# Altium PCB powerboardv2.PcbDoc
Units mil, origin at the board's own origin, x right, y up, seen from the top; angles counter-clockwise.
Board outline 3000 x 1500 mil, 2 copper layers (Top Layer, Bottom Layer); 12 components, 11 nets, 60 pads, 0 vias.
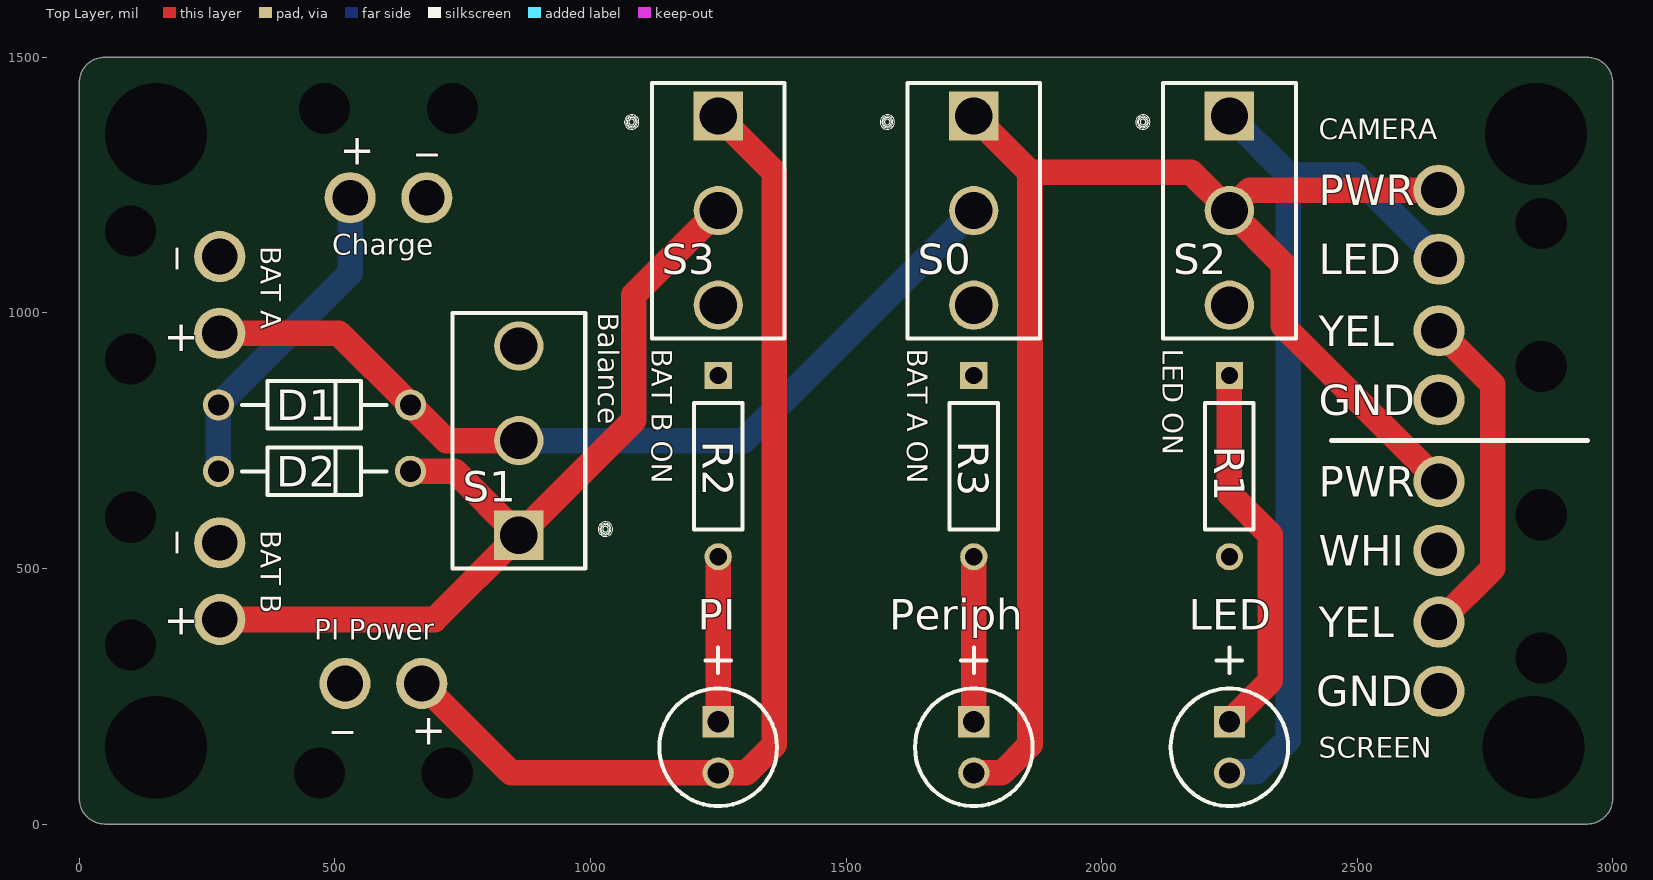
[diagram p0: Top Layer view]
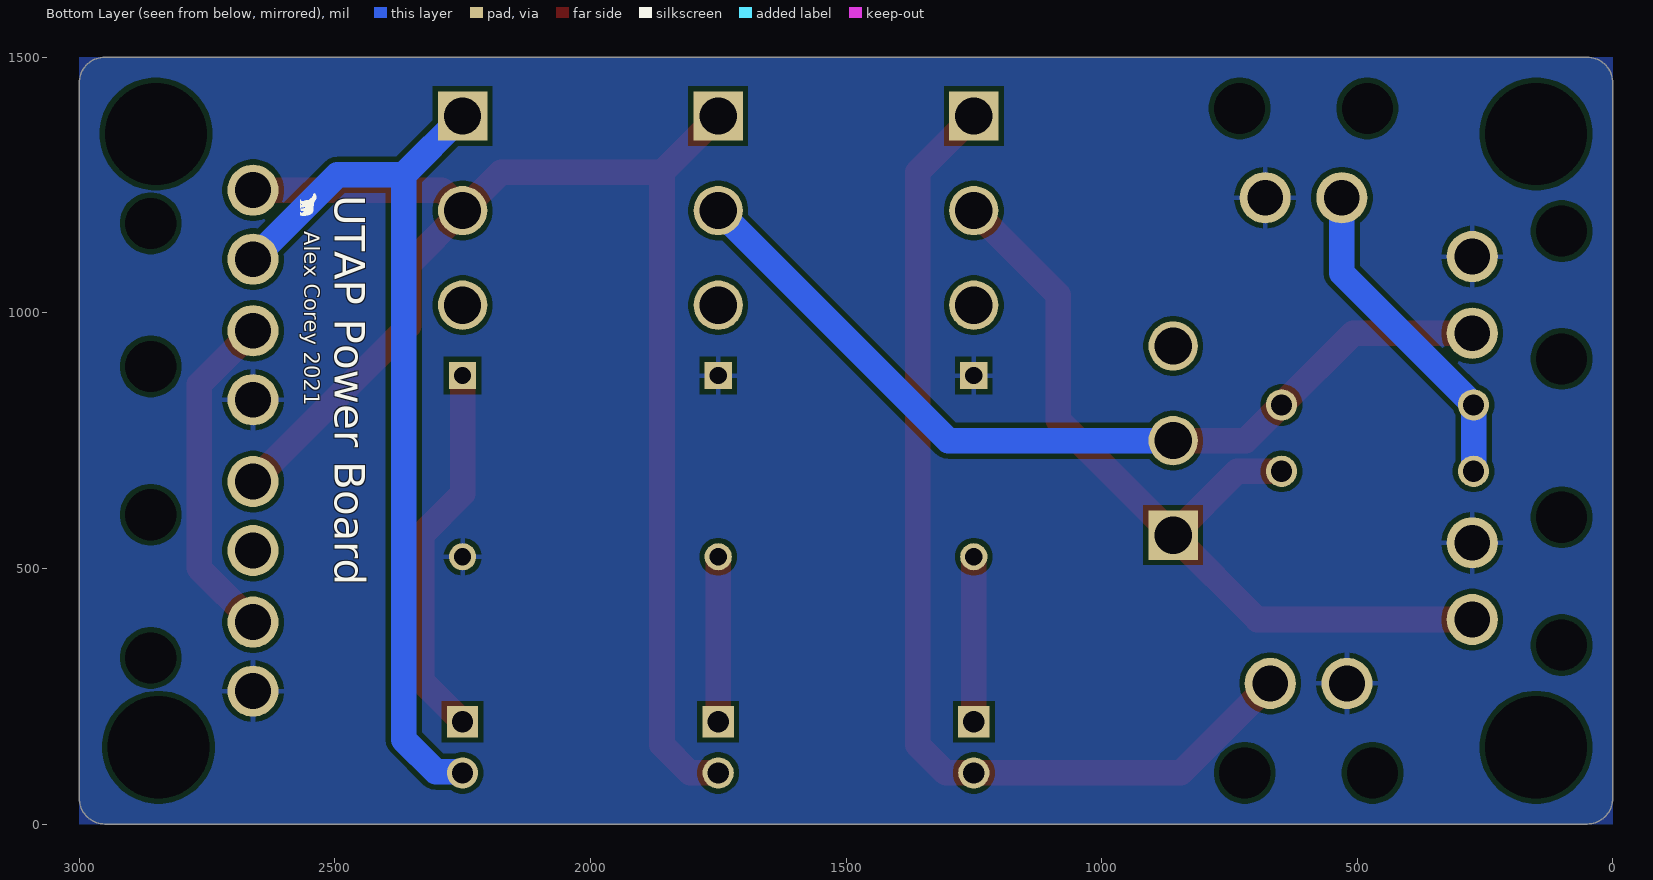
[diagram p1: Bottom Layer view, seen from below]

## Layer stack, top to bottom
Top Solder: solder mask 0.4, Solder Resist, Dk 3.5
Top Layer: signal copper 1.4
Dielectric 1: dielectric 12.6, FR-4, Dk 4.8
Bottom Layer: signal copper 1.4
Bottom Solder: solder mask 0.4, Solder Resist, Dk 3.5

## Board outline
0,50 0,1450 cw(c50,1450) 50,1500 2950,1500 cw(c2950,1450) 3000,1450 3000,50 cw(c2950,50) 2950,0 50,0 cw(c50,50)

## Design rules (kind name [scope] priority, off if disabled: settings)
Clearance [All] p1: gap=10 ignorepadtopadclearanceinfootprint=FALSE except(0: Arc-Hole Track-Hole SMDPad-Hole THPad-Hole Via-Hole Fill-Hole Poly-Hole Region-Hole Text-Hole)
PolygonConnect [All] p1: connectstyle=Relief reliefconductorwidth=10 reliefentries=4 polygonreliefangle="90 Angle" airgapwidth=10
RoutingVias [All] p1: holewidth=28 width=50 viastyle="Through Hole" minholewidth=28 minwidth=50 maxholewidth=28 maxwidth=50
SolderMaskExpansion [All] p1: expansion=4 istentingtop=FALSE
Width [All] p1: maxlimit=100 minlimit=10 preferedwidth=50
30 further rules are at their usual default settings.

## Components (designator, comment, footprint, x,y, rotation, side; value= is the part's Value field where it differs from the comment)
D1 "1N4001" ONSC-AXIAL_LEAD-2-59-10_P 460,820 r180 top
D2 "1N4001" ONSC-AXIAL_LEAD-2-59-10_P 460,690 r180 top
LED "HLMP-3301" AVAG-HLMP-3301-2 2250,200 r270 top (schematic designator DS1)
Periph "HLMP-3301" AVAG-HLMP-3301-2 1750,200 r270 top (schematic designator DS2)
PI "HLMP-3301" AVAG-HLMP-3301-2 1250,200 r270 top (schematic designator DS3)
R1 "MFR-25FBF52-1K" RESA60-630X240 2250,700 r270 top
R2 "MFR-25FBF52-1K" RESA60-630X240 1250,700 r270 top
R3 "MFR-25FBF52-1K" RESA60-630X240 1750,700 r270 top
S0 "1101M2S3CQE2" SW_1101M2S3CQE2 1750,1200 r0 top (schematic designator S)
S1 "1101M2S3CQE2" SW_1101M2S3CQE2 860,750 r180 top
S2 "1101M2S3CQE2" SW_1101M2S3CQE2 2250,1200 r0 top
S3 "1101M2S3CQE2" SW_1101M2S3CQE2 1250,1200 r0 top

## Footprints (in the part's own frame and the unit in brackets; to place one, negate y for a bottom-side part, rotate by r counter-clockwise, add the part's x,y. Pads: shape width x height; smd on the part's side, far side on the other; paste and mask are expansions set on the pad)
AVAG-HLMP-3301-2 [mm] "THD, 2-Leads, Body Dia 5.85mm"
  rect 1.55x1.55 hole 1.05: 1(0,0)
  round 1.55 hole 1.05: 2(2.54,0)
  silkscreen extent -3.68,-2.92 4.19,2.92
ONSC-AXIAL_LEAD-2-59-10_P [mm] "AXIAL, 2-Leads, Diameter 2.35mm"
  round 1.55 hole 1.05: 1(-4.77,0) 2(4.77,0)
  silkscreen extent -3.59,-1.17 3.59,1.17
RESA60-630X240 [mm] "Axial Resistor, 2-Leads, Dia 2.4mm, Body Length 6.3mm"
  rect 1.35x1.35 hole 0.85: 1(-4.5,0)
  round 1.35 hole 0.85: 2(4.5,0)
  silkscreen extent -3.15,-1.2 3.15,1.2, body extent -3.15,-1.2 3.15,1.2, height 2.4
SW_1101M2S3CQE2 [mm]
  rect 2.45x2.45 hole 1.85: 1(0,4.7)
  round 2.45 hole 1.85: 2(0,0) 3(0,-4.7)
  silkscreen extent -4.66,-6.35 3.3,6.35

## Part data
D1 D2: library part CMP-0902-00117-1, "Standard Recovery Rectifier, 2-Pin Axial_Lead, Pb-Free, Bulk Bag", Manufacturer="On Semiconductor", ComponentLink1Description="Manufacturer URL", ComponentLink1URL=http://www.onsemi.com/, ComponentLink2Description=Datasheet, ComponentLink2URL=http://www.onsemi.com/pub_link/Collateral/1N4001-D.PDF, ComponentLink3Description="Package Specification", ComponentLink3URL=http://www.onsemi.cn/pub_link/Collateral/59-10.PDF, DatasheetVersion="Rev. 13", IFSM Max (A)=30, IO(rec) Max (A)=1, Mounting Technology="Through Hole", PackageDescription="2-Pin, Axial Lead, Diameter 2.35 mm", PackageReference=AXIAL_LEAD-2-59-10, PackageVersion="Rev. U, 02/2005", Packing="Bulk Bag", PartNumber=1N4001, RoHS=TRUE, Type="Standard Recovery", VRRM Max (V)=50
LED Periph PI: library part CMP-2000-06411-1, "T-1 3/4 (5 mm) Diffused LED Lamp, 1.9 V, -40 to 100 degC, 2-Pin THD, RoHS, Bulk", Emitting Color=Red, Forward Current=25mA, Forward Voltage=2.4V, Manufacturer=Avago, Operating Temp Range=-40Cto100C, Operating Temperature Classification=Industrial, Package Description="2-Pin Through Hole LED, Dia 5.85 mm", Package Type=T-13/4, Power Dissipation=85W, Reverse Voltage=5V, Test Current (It)=10mA, Chip Material=GaP, Datasheet URL=http://www.avagotech.com/docs/AV02-1558EN, Datasheet Version=03/2015, DELETED=Compliant, Dominant Wave Length=626nm, High Brightness=No, Lens Dimensions=5.08x5.08x8.3mm, Lens Type=ColoredDiffused, Lum Intensity=5.4mcd, Luminous Intensity=5.4mcd, Main Category=StandardLED, Manufacturer URL=http://www.avagotech.com/, Mounting=ThroughHole, Mounting Technology=ThroughHole, Number of  Elements=1, Package Reference=HLMP-3301, Packaging=TapeandReel, Peak Wavelength=635nm, Pin Count=2, Product Depth (mm)=6.1mm, Product Height (mm)=9.19mm, Product Length (mm)=6.1mm, Rad Hardened=No, Shape Type=Circular, Type=Uni-Color, Viewing Angle=60deg
R1 R2 R3: library part CMP-1659-00075-1, "Axial Resistor, 1 KOhm, +/- 1%, 250 mW, -55 to 155 degC, 2-Pin THD, RoHS, Bulk", Case\Package=Axial, Max Operating Temperature="155 degC", Min Operating Temperature="-55 degC", Package Quantity=200, Power Rating="250 mW", Resistance="10 kohm", Tolerance=1%, Voltage Rating="250 V", ComponentLink1Description="Manufacturer URL", ComponentLink1URL=http://www.yageo.com/, ComponentLink2Description=Datasheet, ComponentLink2URL=http://www.yageo.com/documents/recent/Yageo%20LR_MFR_2013.pdf, DatasheetVersion=Apr-13, Length="0.248 inch", PackageDescription="2-Pin Axial Lead, Dia 2.4 mm, Body Length 6.3 mm", PackageReference=MFR-25, Packaging=Bulk, RoHSCompliant=true
S0 S1 S2 S3: "Slide Switch SPDT Through Hole", Package=None, Digi-Key_Part_Number=CKN5001-ND, Digi-Key_Purchase_URL=https://www.digikey.fr/product-detail/en/c-k/1101M2S3CQE2/CKN5001-ND/67042?utm_source=snapeda&utm_medium=aggregator&utm_campaign=symbol, MF=C&K, MP=1101M2S3CQE2, SnapEDA_Link=https://www.snapeda.com/parts/1101M2S3CQE2/C%26K/view-part/287375/?ref=snap

## Free pads (board coordinates)
  round 100 hole 70: 45(275,400) 45(275,550) 45(275,960) 45(275,1110) 45(520,275) 45(530,1225) 45(670,275) 45(680,1225) 45(2660,260) 45(2660,395) 45(2660,535) 45(2660,670) 45(2660,830) 45(2660,965) 45(2660,1105) 45(2660,1240)
  round 60 hole 100: 46(100,350) 46(100,600) 46(100,910) 46(100,1160) 46(470,100) 46(480,1400) 46(720,100) 46(730,1400) 46(2860,325) 46(2860,605) 46(2860,895) 46(2860,1175)
  round 60 hole 200: 46(150,150) 46(150,1350) 46(2845,150) 46(2850,1350)

## Nets (pads, with @x,y where several pads share a name; then routed paths per layer and width w, separated by ;. In a path a pad name is that pad's centre, name@x,y a point inside that pad or via, vN(x,y) a via of type N, cw(c..) or ccw(c..) an arc to the next point about the centre after c; other vN are vias at no path point)
GND: pad.45@275,550 pad.45@275,1110 pad.45@520,275 pad.45@680,1225 pad.45@2660,260 pad.45@2660,830 R1.2 R2.1 R3.1
NetD1_1: D1.1 pad.45@275,960 S0.2 S1.2 | length 1748.4
  Top Layer w50: pad.45@275,960 507.8,960 D1.1 717.8,750 S1.2
  Bottom Layer w50: S1.2 1300,750 S0.2
NetD1_2: D1.2 D2.2 pad.45@530,1225 | length 641.8
  Bottom Layer w50: D2.2 D1.2 530,1077.8 pad.45@530,1225
NetD2_1: D2.1 pad.45@275,400 S1.1 S3.2 | length 1713.9
  Top Layer w50: pad.45@275,400 695.04,400 S1.1 ; D2.1 734.96,690 S1.1 ; S3.2 1085,1035 1085,789.96 S1.1
NetDS1_1: LED.1 R1.1 | length 743.4
  Top Layer w50: LED.1 2330,280 2330,565.98 2250,645.98 R1.1
NetDS1_2: LED.2 pad.45@2660,1105 S2.1 | length 1773
  Bottom Layer w50: LED.2 2252.11,102.11 2302.11,102.11 2365,165 2365,1270.04 ; S2.1 2365,1270.04 ; pad.45@2660,1105 2494.96,1270.04 2365,1270.04
NetDS2_1: Periph.1 R3.2 | length 322.8
  Top Layer w50: Periph.1 R3.2
NetDS2_2: pad.45@2660,670 pad.45@2660,1240 Periph.2 S0.1 S2.2 | length 2955.9
  Top Layer w50: Periph.2 1805,100 1860,155 1860,1275.04 ; S0.1 1860,1275.04 ; pad.45@2660,670 2355,975 2355,1095 S2.2 ; pad.45@2660,1240 2290,1240 S2.2 ; 1860,1275.04 2174.96,1275.04 S2.2
NetDS3_1: PI.1 R2.2 | length 322.8
  Top Layer w50: PI.1 R2.2
NetDS3_2: pad.45@670,275 PI.2 S3.1 | length 2060.9
  Top Layer w50: pad.45@670,275 845,100 PI.2 1305,100 1360,155 1360,1275.04 S3.1
Yellow: pad.45@2660,395 pad.45@2660,965 | length 657
  Top Layer w50: pad.45@2660,395 2765,500 2765,860 pad.45@2660,965
pads on no net: S0.3 S1.3 S2.3 S3.3

## Polygon pours and split planes (outlines as drawn)
GND on Bottom Layer "NONET_L-01_P-001" (solid, pour order 0): 0,1500 3000,1500 3000,0 0,0

## Silkscreen, mask and mechanical layers (free items; w line width, h text height)
Top Overlay:
  lines w10: 2450,750 2950,750
  text "CAMERA" at 2425,1340 h40
  text "_" at 660,1325 h60
  text "+" at 510,1290 h60
  text "PWR" at 2425,1210 h60
  text "BAT A" at 355,1130 h40 r270
  text "Charge" at 495,1113.33 h40
  text "_" at 175,1085 h60 r90
  text "LED" at 2425,1075 h60
  text "Balance" at 1015,1000 h40 r270
  text "YEL" at 2425,935 h60
  text "BAT B ON" at 1120,930 h40 r270
  text "BAT A ON" at 1620,930 h40 r270
  text "LED ON" at 2120,930 h40 r270
  text "+" at 165,925 h60
  text "GND" at 2425,800 h60
  text "PWR" at 2425,640 h60
  text "BAT B" at 355,575 h40 r270
  text "_" at 175,530 h60 r90
  text "WHI" at 2425,505 h60
  text "+" at 165,370 h60
  text "YEL" at 2425,365 h60
  text "PI Power" at 460,360 h40
  text "GND" at 2420,230 h60
  text "_" at 495,195 h60
  text "+" at 650,155 h60
  text "SCREEN" at 2425,130 h40
Bottom Overlay:
  region: 1613 vertices and 1 holes, not listed, extent 2536.24,1189.94 2567.76,1233.53
  text "UTAP Power Board" at 2500,1230 h60 r90
  text "Alex Corey 2021" at 2560,1160 h30 r90
Mechanical 1:
  lines w10: 0,50 ccw(c50,50) 50,0 2950,0 ccw(c2950,50) 3000,50 3000,1450 ccw(c2950,1450) 2950,1500 50,1500 ccw(c50,1450) 0,1450 0,500 0,50